# Altium PCB PCB1.PcbDoc
Units mil, origin at the board's own origin, x right, y up, seen from the top; angles counter-clockwise.
Board outline 6000 x 4000 mil, 2 copper layers (Top Layer, Bottom Layer); 20 components, 12 nets, 48 pads, 0 vias.
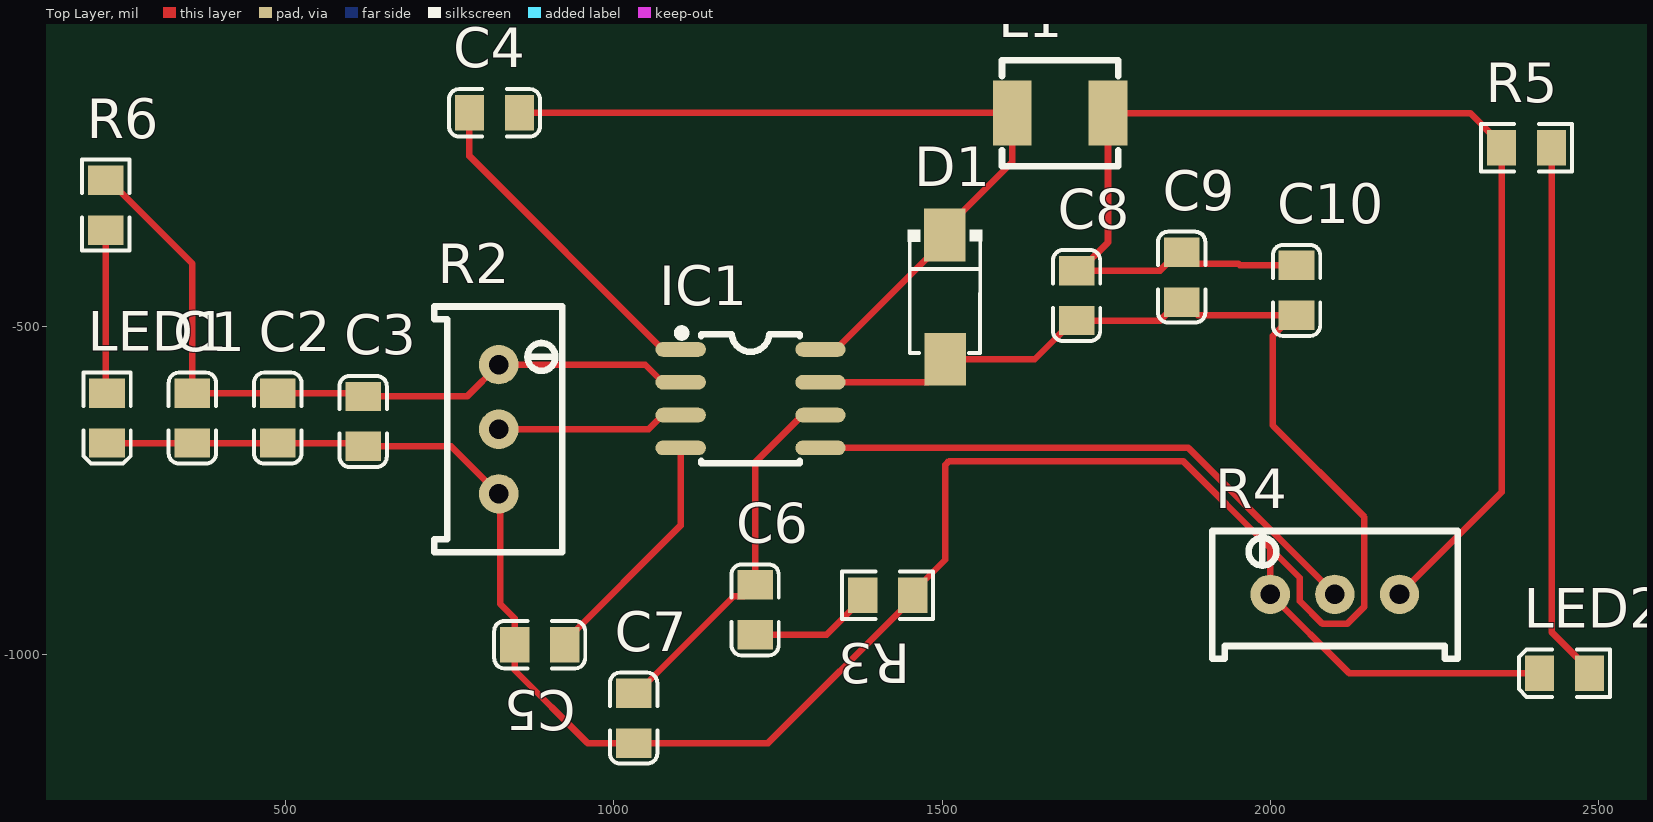
[diagram p0: Top Layer view]
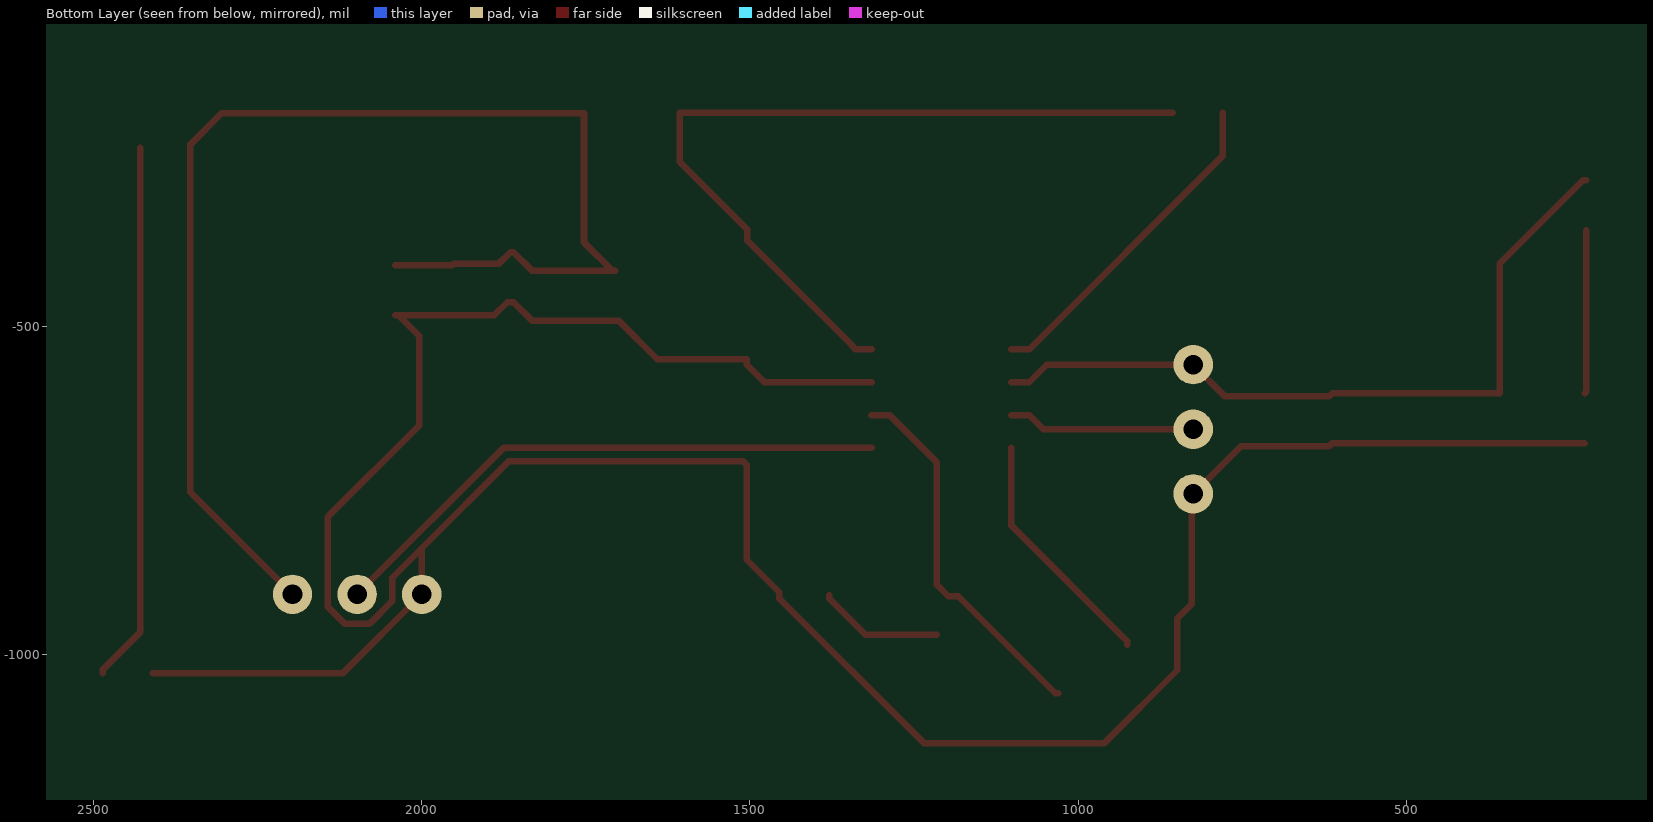
[diagram p1: Bottom Layer view, seen from below]

## Layer stack, top to bottom
Top Solder: solder mask 0.4, Solder Resist, Dk 3.5
Top Layer: signal copper 1.4
Dielectric 1: dielectric 12.6, FR-4, Dk 4.8
Bottom Layer: signal copper 1.4
Bottom Solder: solder mask 0.4, Solder Resist, Dk 3.5

## Board outline
0,-4000 6000,-4000 6000,0 0,0

## Design rules (kind name [scope] priority, off if disabled: settings)
Clearance [All] p1: gap=10 ignorepadtopadclearanceinfootprint=FALSE except(0: Arc-Hole Track-Hole SMDPad-Hole THPad-Hole Via-Hole Fill-Hole Poly-Hole Region-Hole Text-Hole)
PolygonConnect [All] p1: connectstyle=Relief reliefconductorwidth=10 reliefentries=4 polygonreliefangle="90 Angle" airgapwidth=10
RoomDefinition Sheet1 [InComponentClass('Sheet1')] p1: confinementstyle=ConfineIn formatcopy=TRUE lockcomponents=FALSE outline 59.63,-1283.39 2604.63,-1283.39 2604.63,-30.35 59.63,-30.35
RoutingVias [All] p1: holewidth=28 width=50 viastyle="Through Hole" minholewidth=28 minwidth=50 maxholewidth=28 maxwidth=50
SolderMaskExpansion [All] p1: expansion=4 istentingtop=FALSE
Width [All] p1: maxlimit=10 minlimit=10 preferedwidth=10
30 further rules are at their usual default settings.

## Components (designator, comment, footprint, x,y, rotation, side; value= is the part's Value field where it differs from the comment)
C1 "22u" C0805 358.03,-640 r90 top
C2 "22u" C0805 488.03,-640 r90 top
C3 "0.1u" C0805 618.03,-645 r90 top
C4 "0.1u" C0805 818.03,-175 r0 top
C5 "0.01u" C0805 886.97,-985 r0 top
C6 "1n" C0805 1215,-931.97 r90 top
C7 "47p" C0805 1030,-1096.97 r90 top
C8 "22u" C0805 1704.63,-453.39 r90 top
C9 "22u" C0805 1864.63,-425.35 r90 top
C10 "0.1u" C0805 2039.63,-445.35 r90 top
D1 "B340A" DIODE-241AC 1504.26,-455.71 r270 top
IC1 "Tp" SOIC-8 1208.13,-610.35 r0 top
L1 "6.8u" L0420 1679.63,-175.35 r0 top
LED1 "GR" LED0805 228.03,-640 r90 top
LED2 "RD" LED0805 2447.66,-1028.39 r0 top
R2 "100k" 3296W 824.63,-656.95 r270 top
R3 "29.4k" R0805 1416.97,-910 r180 top
R4 "100k" 3296W 2098.03,-908.39 r0 top
R5 "510R" R0805 2390,-228.03 r180 top
R6 "1k" R0805 226.06,-315.69 r90 top

## Footprints (in the part's own frame and the unit in brackets; to place one, negate y for a bottom-side part, rotate by r counter-clockwise, add the part's x,y. Pads: shape width x height; smd on the part's side, far side on the other; paste and mask are expansions set on the pad)
3296W [mil]
  round 60 hole 30 mask+2: 1(-98.4,0) 2(98.4,0) 3(0,0)
  silkscreen extent -187,-98 187,97
C0805 [mil]
  rect 44.61x54.21 smd mask+2.01: 1(-38.03,0) 2(38.03,0)
  silkscreen extent -69,-36 69,36
DIODE-241AC [mm]
  rect 2.046x1.62 smd: 1(-2.404,-0.009) 2(2.404,0.009)
  silkscreen extent -2.61,-1.44 2.16,1.44
L0420 [mm]
  rect 1.5x2.5 smd mask+0.051: 1(-1.85,0) 2(1.85,0)
  silkscreen extent -2.25,-2.05 2.25,2.05
LED0805 [mil]
  rect 44.61x54.21 smd mask+2.01: 1(38.03,0) 2(-38.03,0)
  silkscreen extent -69,-36 69,36
R0805 [mil]
  rect 44.61x54.21 smd mask+2.01: 1(-38.03,0) 2(38.03,0)
  silkscreen extent -69,-36 69,36
SOIC-8 [mil]
  oval 76.78x22.38 smd: 1(-106.5,75) 2(-106.5,25) 3(-106.5,-25) 4(-106.5,-75) 5(106.5,-75) 6(106.5,-25) 7(106.5,25) 8(106.5,75)
  silkscreen extent -111,-98 75,106

## Part data
C1 C2 C3 C4 C5 C6 C7 C8 C9 C10: library part Capacitance
D1: library part Diode_NORMAL
IC1: library part IC_8P
L1: library part Inductance
LED1 LED2: library part LED_IR_IN
R2 R4: library part Resistance_ADJ
R3 R5 R6: library part Resistance

## Nets (pads, with @x,y where several pads share a name; then routed paths per layer and width w, separated by ;. In a path a pad name is that pad's centre, name@x,y a point inside that pad or via, vN(x,y) a via of type N, cw(c..) or ccw(c..) an arc to the next point about the centre after c; other vN are vias at no path point)
FB: IC1.5 R4.3 | length 875.8
  Top Layer w10: IC1.5 1875,-685.35 R4.3
GND: C1.1 C2.1 C3.1 C5.1 C7.1 C8.1 C9.1 C10.1 D1.2 IC1.7 LED1.2 LED2.2 R2.2 R3.1 R4.1 | length 4482.9
  Top Layer w10: LED1.2 C1.1 C2.1 613.03,-678.03 C3.1 752.31,-683.03 R2.2 826.63,-757.36 826.63,-922.7 848.94,-945 C5.1 848.94,-1024.11 959.83,-1135 C7.1 1234.8,-1135 1455,-914.8 R3.1 1455,-905.2 1504.63,-855.57 1504.63,-711.21 1510.49,-705.35 1866.71,-705.35 1999.63,-838.27 ; IC1.7 1477.74,-585.35 1504.63,-558.47 D1.2 1640.89,-550.35 1699.83,-491.42 C8.1 1831.8,-491.42 1859.83,-463.39 C9.1 1869.43,-463.39 1889.43,-483.39 C10.1@2034.83,-483.39 ; C10.1 C10.1@2034.83,-483.39 ; LED2.2 2119.63,-1028.39 R4.1 1999.63,-838.27 ; 1999.63,-838.27 2044.63,-883.27 2044.63,-918.63 2079.39,-953.39 2116.67,-953.39 2143.03,-927.03 2143.03,-790.75 2003.38,-651.1 2003.38,-514.83 C10.1@2034.83,-483.39
NetC4_1: C4.1 IC1.1 | length 509.5
  Top Layer w10: C4.1 780,-240.93 1074.43,-535.35 IC1.1
NetC4_2: C4.2 D1.1 IC1.8 L1.1 | length 1245.9
  Top Layer w10: C4.2 1606.44,-175 L1.1 1606.8,-249.77 1503.89,-352.67 D1.1 1503.89,-369.46 1344.2,-529.15 1344.2,-529.64 1338.48,-535.35 IC1.8
NetC5_2: C5.2 IC1.4 | length 372.8
  Top Layer w10: C5.2 925,-980.2 1101.63,-803.57 IC1.4
NetC6_1: C6.1 R3.2 | length 191.6
  Top Layer w10: C6.1 1323.74,-970 1378.94,-914.8 R3.2
NetC6_2: C6.2 C7.2 IC1.6 | length 569.1
  Top Layer w10: C7.2 1034.8,-1058.94 1182.5,-911.24 1197.7,-911.24 C6.2 1215,-707.78 1287.43,-635.35 IC1.6
NetIC1_3: IC1.3 R2.3 | length 285.9
  Top Layer w10: R2.3 1052.83,-656.95 1074.43,-635.35 IC1.3
NetLED1_1: LED1.1 R6.1 | length 249.1
  Top Layer w10: R6.1 226.06,-600 LED1.1
NetLED2_1: LED2.1 R5.1 | length 824.2
  Top Layer w10: R5.1 2428.03,-965.92 2485.69,-1023.58 LED2.1
Vin: C1.2 C2.2 C3.2 IC1.2 R2.1 R6.2 | length 1158.6
  Top Layer w10: R6.2 230.87,-277.66 358.03,-404.83 C1.2 C2.2 613.03,-601.97 C3.2 776.22,-606.97 R2.1 1047.63,-558.56 1074.43,-585.35 IC1.2
Vout: C8.2 C9.2 C10.2 L1.2 R4.2 R5.2 | length 1981.6
  Top Layer w10: C8.2 C8.2@1709.43,-415.35 ; C10.2 1953.48,-407.32 1950.78,-404.63 1881.93,-404.63 C9.2 1859.83,-387.32 1831.8,-415.35 C8.2@1709.43,-415.35 ; R4.2 2351.97,-752.85 R5.2 2351.97,-223.23 2304.1,-175.35 L1.2 1752.46,-372.32 C8.2@1709.43,-415.35